# Altium PCB HCPL-3120 DIP Gate Driver Circuit.PcbDoc
Units mil, origin at the board's own origin, x right, y up, seen from the top; angles counter-clockwise.
Board outline 6000 x 4000 mil, 2 copper layers (Top Layer, Bottom Layer); 119 components, 55 nets, 283 pads, 0 vias.
Unrouted connection lines stored in the file: 228.
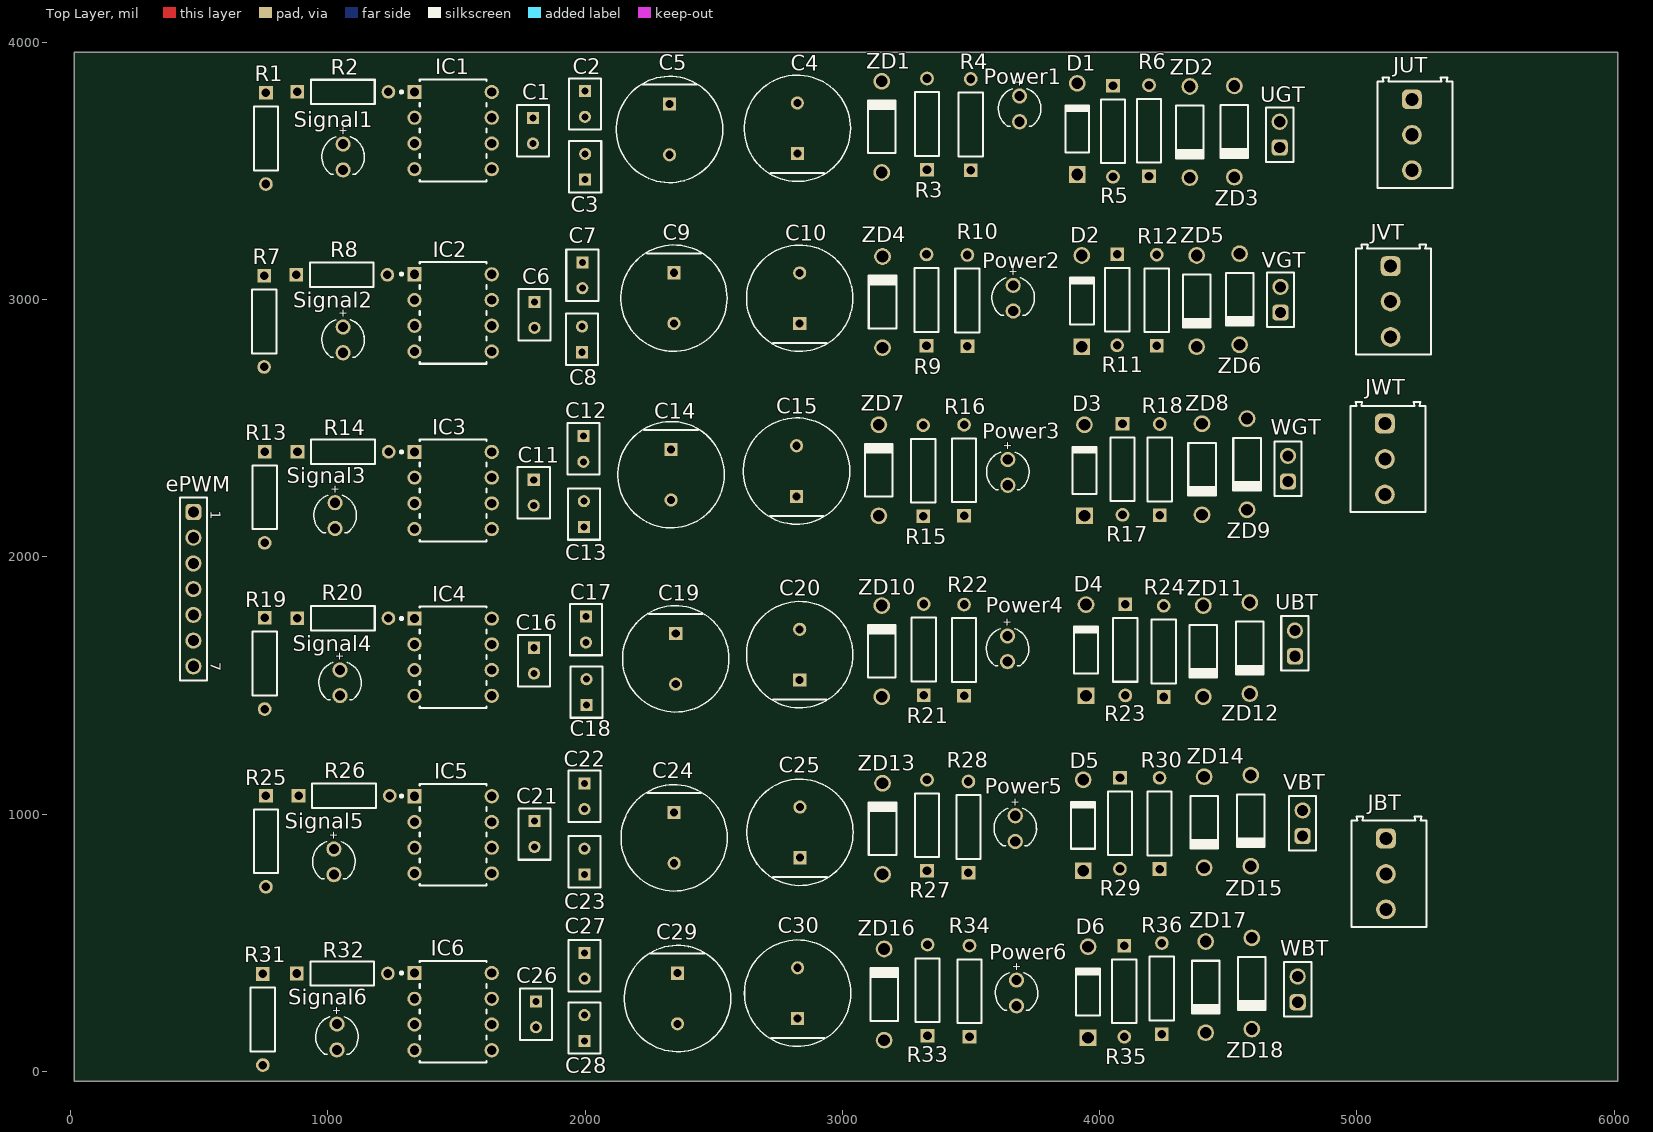
[diagram p0: Top Layer view]
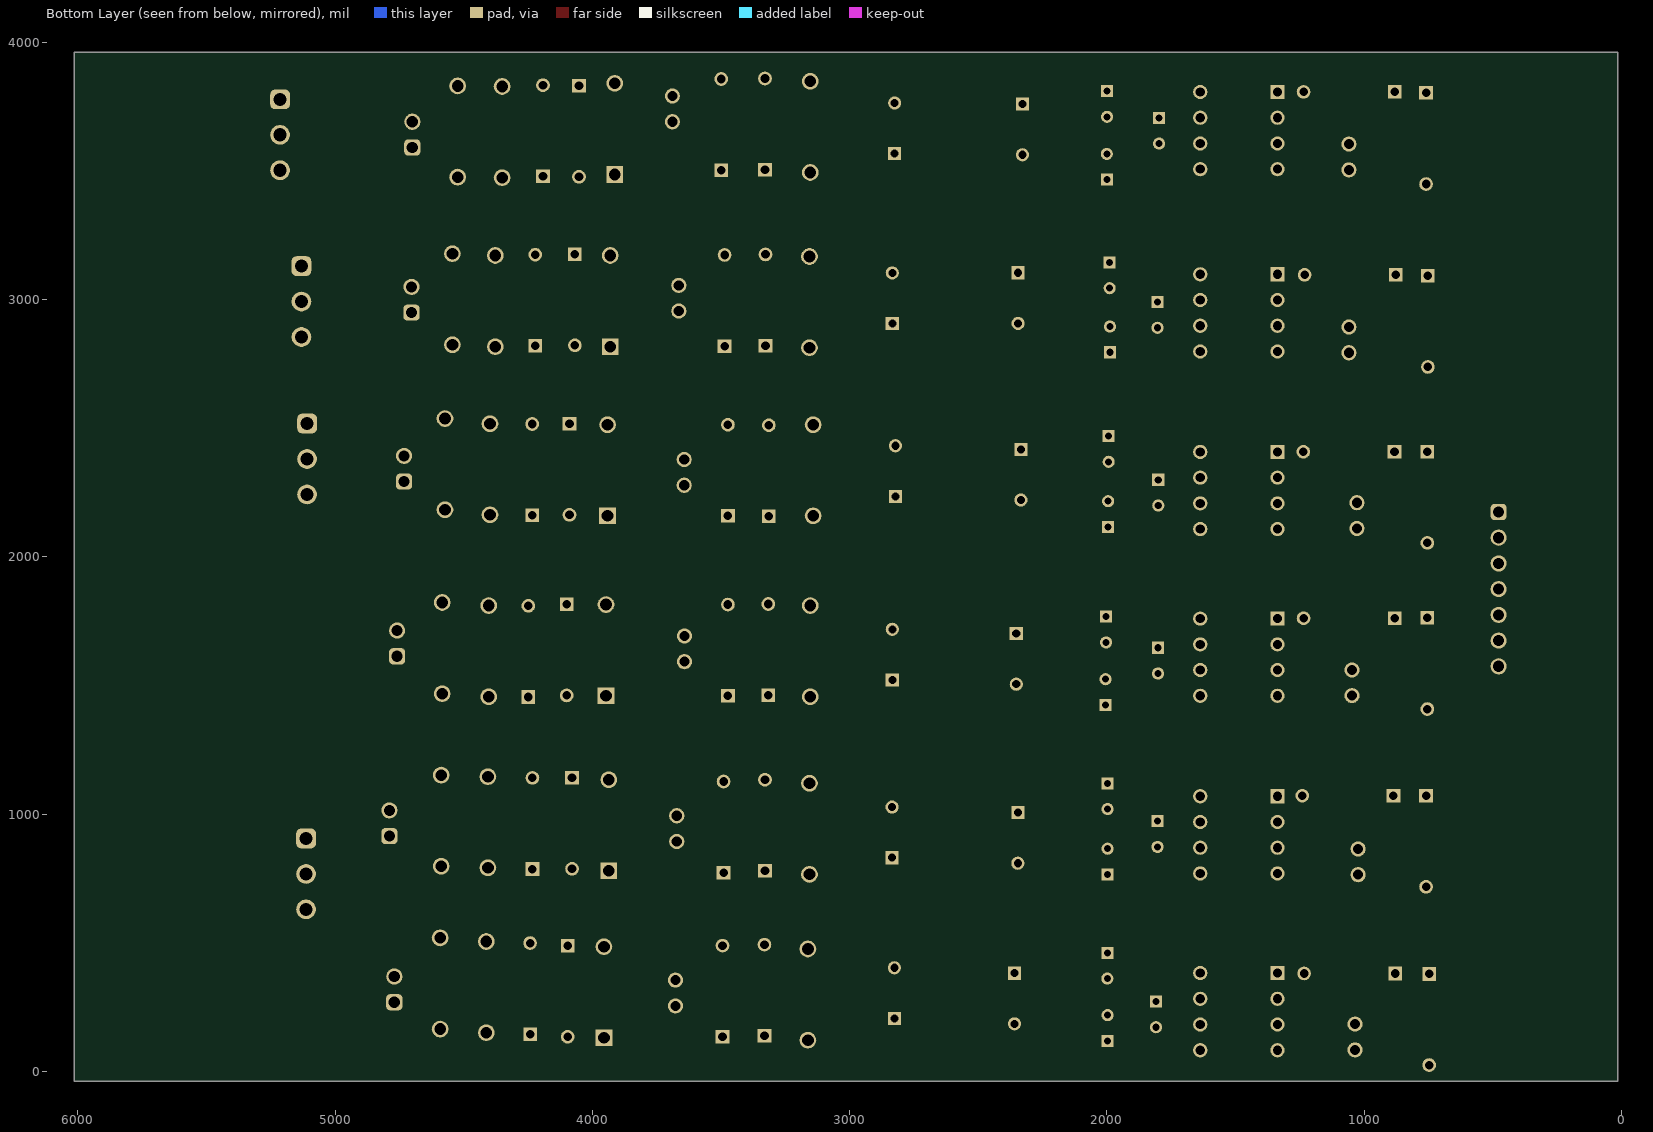
[diagram p1: Bottom Layer view, seen from below]

## Layer stack, top to bottom
Top Solder: solder mask 0.4, Solder Resist, Dk 3.5
Top Layer: signal copper 1.4
Dielectric 1: dielectric 12.6, FR-4, Dk 4.8
Bottom Layer: signal copper 1.4
Bottom Solder: solder mask 0.4, Solder Resist, Dk 3.5

## Board outline
14,-38 6014,-38 6014,3962 14,3962

## Design rules (kind name [scope] priority, off if disabled: settings)
Clearance [All] p1: gap=10 ignorepadtopadclearanceinfootprint=FALSE except(0: Arc-Hole Track-Hole SMDPad-Hole THPad-Hole Via-Hole Fill-Hole Poly-Hole Region-Hole Text-Hole)
PolygonConnect [All] p1: connectstyle=Relief reliefconductorwidth=10 reliefentries=4 polygonreliefangle="90 Angle" airgapwidth=10
RoutingVias [All] p1: holewidth=28 width=50 viastyle="Through Hole" minholewidth=28 minwidth=50 maxholewidth=28 maxwidth=50
SolderMaskExpansion [All] p1: expansion=4 istentingtop=FALSE
Width [All] p1: maxlimit=10 minlimit=10 preferedwidth=10
30 further rules are at their usual default settings.

## Components (designator, comment, footprint, x,y, rotation, side; value= is the part's Value field where it differs from the comment)
C1 "SR205C104KAR" FP-SR20-MFG 1797,3657 r270 top value=100nF
C2 "SR205C104KAR" FP-SR20-MFG 1999,3761 r270 top value=100nF
C3 "SR205C104KAR" FP-SR20-MFG 2000,3517 r90 top value=100nF
C4 "EEUTA1H101" FP-RAD-TH-D_10_0_5-L_12_5-MFG 2825,3666.43 r90 top
C5 "EEUTA1H101" FP-RAD-TH-D_10_0_5-L_12_5-MFG 2328,3662 r270 top
C6 "SR205C104KAR" FP-SR20-MFG 1803,2941 r270 top value=100nF
C7 "SR205C104KAR" FP-SR20-MFG 1989,3095 r270 top value=100nF
C8 "SR205C104KAR" FP-SR20-MFG 1988,2846 r90 top value=100nF
C9 "EEUTA1H101" FP-RAD-TH-D_10_0_5-L_12_5-MFG 2345,3006.42 r270 top
C10 "EEUTA1H101" FP-RAD-TH-D_10_0_5-L_12_5-MFG 2834,3006 r90 top
C11 "SR205C104KAR" FP-SR20-MFG 1800,2250 r270 top value=100nF
C12 "SR205C104KAR" FP-SR20-MFG 1993,2420 r270 top value=100nF
C13 "SR205C104KAR" FP-SR20-MFG 1995,2167 r90 top value=100nF
C14 "EEUTA1H101" FP-RAD-TH-D_10_0_5-L_12_5-MFG 2334,2320 r270 top
C15 "EEUTA1H101" FP-RAD-TH-D_10_0_5-L_12_5-MFG 2822,2334 r90 top
C16 "SR205C104KAR" FP-SR20-MFG 1801,1597 r270 top value=100nF
C17 "SR205C104KAR" FP-SR20-MFG 2003,1718 r270 top value=100nF
C18 "SR205C104KAR" FP-SR20-MFG 2005,1475 r90 top value=100nF
C19 "EEUTA1H101" FP-RAD-TH-D_10_0_5-L_12_5-MFG 2352,1604 r270 top
C20 "EEUTA1H101" FP-RAD-TH-D_10_0_5-L_12_5-MFG 2834,1620.43 r90 top
C21 "SR205C104KAR" FP-SR20-MFG 1803,923 r270 top value=100nF
C22 "SR205C104KAR" FP-SR20-MFG 1997,1070 r270 top value=100nF
C23 "SR205C104KAR" FP-SR20-MFG 1997,816 r90 top value=100nF
C24 "EEUTA1H101" FP-RAD-TH-D_10_0_5-L_12_5-MFG 2346,908 r270 top
C25 "EEUTA1H101" FP-RAD-TH-D_10_0_5-L_12_5-MFG 2835,929.43 r90 top
C26 "SR205C104KAR" FP-SR20-MFG 1809,222 r270 top value=100nF
C27 "SR205C104KAR" FP-SR20-MFG 1998,411 r270 top value=100nF
C28 "SR205C104KAR" FP-SR20-MFG 1997,169 r90 top value=100nF
C29 "EEUTA1H101" FP-RAD-TH-D_10_0_5-L_12_5-MFG 2359,283.57 r270 top
C30 "EEUTA1H101" FP-RAD-TH-D_10_0_5-L_12_5-MFG 2826,304.57 r90 top
D1 "1N4007-B" DIOD-DO-41-P-2_V 3913,3664 r90 top
D2 "1N4007-B" DIOD-DO-41-P-2_V 3931,2995 r90 top
D3 "1N4007-B" DIOD-DO-41-P-2_V 3941,2337 r90 top
D4 "1N4007-B" DIOD-DO-41-P-2_V 3947,1638 r90 top
D5 "1N4007-B" DIOD-DO-41-P-2_V 3936,957 r90 top
D6 "1N4007-B" DIOD-DO-41-P-2_V 3955,308 r90 top
ePWM "61300711121" 61300711121 477,1875 r270 top
IC1 "HCPL-3120" PCBComponent_1 1301.83,3452.67 r0 top
IC2 "HCPL-3120" PCBComponent_1 1301.83,2744.01 r0 top
IC3 "HCPL-3120" PCBComponent_1 1301.83,2053.46 r0 top
IC4 "HCPL-3120" PCBComponent_1 1301.83,1405.43 r0 top
IC5 "HCPL-3120" PCBComponent_1 1301.83,714.87 r0 top
IC6 "HCPL-3120" PCBComponent_1 1301.83,27.47 r0 top
JBT "691214110003" 691214110003 5124.81,768 r270 top
JUT "691214110003" 691214110003 5225.81,3641.2 r270 top
JVT "691214110003" 691214110003 5143,2993 r270 top
JWT "691214110003" 691214110003 5120.81,2381 r270 top
Power1 "151031VS04000" WL-TMRC_D3.95H5.3 53689,-46258 r270 top
Power2 "151031VS04000" WL-TMRC_D3.95H5.3 53664,-46994 r270 top
Power3 "151031VS04000" WL-TMRC_D3.95H5.3 53643,-47671 r270 top
Power4 "151031VS04000" WL-TMRC_D3.95H5.3 53642,-48357 r270 top
Power5 "151031VS04000" WL-TMRC_D3.95H5.3 53672,-49056 r270 top
Power6 "151031VS04000" WL-TMRC_D3.95H5.3 53677,-49695 r270 top
R1 "MFR-25FBF52-1K" RESA60-630X240 759,3627 r270 top
R2 "MFR-25FBF52-221R" RESA60-630X240 1058,3808 r0 top
R3 "MFR-25FBF52-1K" RESA60-630X240 3329,3683 r90 top
R4 "MFR-25FBF52-1K" RESA60-630X240 3499,3681 r90 top
R5 "MFR-25FBF52-47R5" RESA60-630X240 4052,3655 r270 top
R6 "MFR-25FBF5210K" RESA60-630X240 4192,3657 r90 top
R7 "MFR-25FBF52-1K" RESA60-630X240 752,2916 r270 top
R8 "MFR-25FBF52-221R" RESA60-630X240 1054,3097 r0 top
R9 "MFR-25FBF52-1K" RESA60-630X240 3327,2999 r90 top
R10 "MFR-25FBF52-1K" RESA60-630X240 3486,2997 r90 top
R11 "MFR-25FBF52-47R5" RESA60-630X240 4068,3000 r270 top
R12 "MFR-25FBF5210K" RESA60-630X240 4222,2998 r90 top
R13 "MFR-25FBF52-1K" RESA60-630X240 754,2232 r270 top
R14 "MFR-25FBF52-221R" RESA60-630X240 1059,2409 r0 top
R15 "MFR-25FBF52-1K" RESA60-630X240 3314,2335 r90 top
R16 "MFR-25FBF52-1K" RESA60-630X240 3473,2337 r90 top
R17 "MFR-25FBF52-47R5" RESA60-630X240 4089,2341 r270 top
R18 "MFR-25FBF5210K" RESA60-630X240 4234,2339.83 r90 top
R19 "MFR-25FBF52-1K" RESA60-630X240 754,1586 r270 top
R20 "MFR-25FBF52-221R" RESA60-630X240 1058,1762 r0 top
R21 "MFR-25FBF52-1K" RESA60-630X240 3316,1640 r90 top
R22 "MFR-25FBF52-1K" RESA60-630X240 3473,1638 r90 top
R23 "MFR-25FBF52-47R5" RESA60-630X240 4100,1639 r270 top
R24 "MFR-25FBF5210K" RESA60-630X240 4249,1633 r90 top
R25 "MFR-25FBF52-1K" RESA60-630X240 759,895 r270 top
R26 "MFR-25FBF52-221R" RESA60-630X240 1063,1072 r0 top
R27 "MFR-25FBF52-1K" RESA60-630X240 3329,957 r90 top
R28 "MFR-25FBF52-1K" RESA60-630X240 3490,950 r90 top
R29 "MFR-25FBF52-47R5" RESA60-630X240 4079,965 r270 top
R30 "MFR-25FBF5210K" RESA60-630X240 4233,964 r90 top
R31 "MFR-25FBF52-1K" RESA60-630X240 747,202 r270 top
R32 "MFR-25FBF52-221R" RESA60-630X240 1056,381 r0 top
R33 "MFR-25FBF52-1K" RESA60-630X240 3331,316 r90 top
R34 "MFR-25FBF52-1K" RESA60-630X240 3494,312 r90 top
R35 "MFR-25FBF52-47R5" RESA60-630X240 4096,312 r270 top
R36 "MFR-25FBF5210K" RESA60-630X240 4242,322 r90 top
Signal1 "151031SS04000" WL-TMRC_D3.95H5.3 51059,-46445 r270 top
Signal2 "151031SS04000" WL-TMRC_D3.95H5.3 51059,-47156 r270 top
Signal3 "151031SS04000" WL-TMRC_D3.95H5.3 51028,-47839 r270 top
Signal4 "151031SS04000" WL-TMRC_D3.95H5.3 51047,-48489 r270 top
Signal5 "151031SS04000" WL-TMRC_D3.95H5.3 51023,-49185 r270 top
Signal6 "151031SS04000" WL-TMRC_D3.95H5.3 51035,-49866 r270 top
UBT "61300211121" 61300211121 4759,1664 r90 top
UGT "61300211121" 61300211121 4700,3642 r90 top
VBT "61300211121" 61300211121 4789,965 r90 top
VGT "61300211121" 61300211121 4703,3000 r90 top
WBT "61300211121" 61300211121 4770,319 r90 top
WGT "61300211121" 61300211121 4732,2343 r90 top
ZD1 "1N4749A" FAIR-DO-41-2_V 3153,3672 r90 top
ZD2 "1N4749A" FAIR-DO-41-2_V 4351,3652 r270 top
ZD3 "1N4749A" FAIR-DO-41-2_V 4524,3654 r270 top
ZD4 "1N4749A" FAIR-DO-41-2_V 3156,2991 r90 top
ZD5 "1N4749A" FAIR-DO-41-2_V 4377,2995 r270 top
ZD6 "6" FAIR-DO-41-2_V 4544,3002 r270 top
ZD7 "1N4749A" FAIR-DO-41-2_V 3142,2337 r90 top
ZD8 "1N4749A" FAIR-DO-41-2_V 4398,2341 r270 top
ZD9 "1N4749A" FAIR-DO-41-2_V 4573,2361 r270 top
ZD10 "1N4749A" FAIR-DO-41-2_V 3153,1634 r90 top
ZD11 "1N4749A" FAIR-DO-41-2_V 4403,1634 r270 top
ZD12 "1N4749A" FAIR-DO-41-2_V 4584,1646 r270 top
ZD13 "1N4749A" FAIR-DO-41-2_V 3156,943.17 r90 top
ZD14 "1N4749A" FAIR-DO-41-2_V 4406,968.83 r270 top
ZD15 "1N4749A" FAIR-DO-41-2_V 4588,975 r270 top
ZD16 "1N4749A" FAIR-DO-41-2_V 3162,299 r90 top
ZD17 "1N4749A" FAIR-DO-41-2_V 4412,328 r270 top
ZD18 "1N4749A" FAIR-DO-41-2_V 4592,342 r270 top

## Footprints (in the part's own frame and the unit in brackets; to place one, negate y for a bottom-side part, rotate by r counter-clockwise, add the part's x,y. Pads: shape width x height; smd on the part's side, far side on the other; paste and mask are expansions set on the pad)
61300211121 [mm] "Pin Header, pitch 2.54 mm, THT, Vertical, single row, 2p"
  rrect50% 1.6x1.6 hole 1.1: 1(-1.27,0)
  round 1.6 hole 1.1: 2(1.27,0)
  silkscreen extent -2.69,-1.34 2.69,1.34, body extent -2.54,-1.27 2.54,1.27, height 8.57
61300711121 [mm] "Pin Header, pitch 2.54 mm, THT, Vertical, single row, 7p"
  rrect50% 1.6x1.6 hole 1.1: 1(-7.62,0)
  round 1.6 hole 1.1: 2(-5.08,0) 3(-2.54,0) 4(0,0) 5(2.54,0) 6(5.08,0) 7(7.62,0)
  silkscreen extent -9.04,-1.34 9.04,1.34, body extent -8.89,-1.27 8.89,1.27, height 8.57
691214110003 [mm] "3.50 mm Horizontal Entry Modular, 3p"
  rrect50% 1.95x1.95 hole 1.3: 1(-3.5,-0.3)
  round 1.95 hole 1.3: 2(0,-0.3) 3(3.5,-0.3)
  silkscreen extent -5.65,-3.7 5.25,3.7, body extent -5.7,-3.7 5.25,3.7, height 8.55
DIOD-DO-41-P-2_V [mm] "2-Leads, Axial Lead, Body 4.635x2.36mm, Pin Spacing 9mm"
  rect 1.65x1.65 hole 1.15: 1(-4.5,0)
  round 1.65 hole 1.15: 2(4.5,0)
  silkscreen extent -2.32,-1.18 2.32,1.18, body extent -4.93,-1.18 4.93,1.18, height 2.35
FAIR-DO-41-2_V [mm] "2-Leads, Axial leaded, Body 2.72x5.2mm, Pin Spacing 9mm"
  round 1.65 hole 1.15: 1(-4.5,0) 2(4.5,0)
  silkscreen extent -2.6,-1.36 2.6,1.36, body extent -4.93,-1.36 4.93,1.36, height 2.71
FP-RAD-TH-D_10_0_5-L_12_5-MFG [mm]
  rect 1.3x1.3 hole 0.8 paste-1000 mask+0: 1(-2.5,0)
  round 1.3 hole 0.8 paste-1000 mask+0: 2(2.5,0)
  silkscreen extent -5.25,-5.25 5.25,5.25, body extent -5.35,-5.35 5.35,5.35, height 0.25
FP-SR20-MFG [mm]
  rect 1.2x1.2 hole 0.7 paste-1000 mask+0: 1(-1.27,0)
  round 1.2 hole 0.7 paste-1000 mask+0: 2(1.27,0)
  silkscreen extent -2.54,-1.59 2.54,1.59, body extent -2.64,-1.69 2.64,1.69, height 0.25
PCBComponent_1 [mm]
  rect 1.4x1.4 hole 0.9 paste-1000 mask+0: 1(0.889,9.017)
  round 1.4 hole 0.9 paste-1000 mask+0: 2(0.889,6.477) 3(0.889,3.937) 4(0.889,1.397) 5(8.509,1.397) 6(8.509,3.937) 7(8.509,6.477) 8(8.509,9.017)
  silkscreen extent -0.53,0.18 8,10.23, body extent 0.09,0.08 9.31,10.33, height 0.25
RESA60-630X240 [mm] "Axial Resistor, 2-Leads, Dia 2.4mm, Body Length 6.3mm"
  rect 1.35x1.35 hole 0.85: 1(-4.5,0)
  round 1.35 hole 0.85: 2(4.5,0)
  silkscreen extent -3.15,-1.2 3.15,1.2, body extent -3.15,-1.2 3.15,1.2, height 2.4
WL-TMRC_D3.95H5.3 [mm] "THT Mono-color Round Color LED, 2-leads"
  round 1.5 hole 1: 1(-1271.27,-1270) 2(-1268.73,-1270)
  silkscreen extent -1272,-1272.1 -1268.31,-1267.9, body extent -1271.99,-1271.97 -1268.37,-1268.03, height 5.35

## Part data
C1 C2 C3 C6 C7 C8 C11 C12 C13 C16 C17 C18 C21 C22 C23 C26 C27 C28: library part CMP-04427-000013-1, "CAP CER 0.1UF 50V X7R RADIAL", Capacitance=100nF, Manufacturer=AVX, Package=SR20, Temperature="-55°C to +125°C", Temperature Characteristic=X7R, Temperature Range High=+125°C, Temperature Range Low=-55°C, Tolerance=10%, Voltage=50V, Automotive=No, Category=Cap, ComponentLink2Description=Datasheet, ComponentLink2URL=http://datasheets.avx.com/SR-Series.pdf, Device Class L1="Passive Components", Device Class L2=Capacitors, Device Class L3="Ceramic Capacitors", Digikey Description="CAP CER 0.1UF 50V X7R RADIAL", Height=5.08mm, Lead Free=Yes, Manufacturer Part Number=SR205C104KAR, Material=Ceramic, Mouser Description="Multilayer Ceramic Capacitors MLCC - Leaded 50volts 0.1uF 10% X7R", Octopart=https://octopart.com/sr205c104kar-avx-145048, RoHS=TRUE, Voltage Rating=50V
C4 C5 C9 C10 C14 C15 C19 C20 C24 C25 C29 C30: library part CMP-05427-000114-1, "Aluminum Electrolytic Capacitors (Radial Lead Type) AEC-Q200 Qualified 100uF ±20% 50V", Capacitance=100uF, Case/Package=Radial, ESR (Equivalent Series Resistance)=180mR, Max Operating Temperature=125°C, Min Operating Temperature=-40°C, Package Quantity=200, Ripple Current=555mA, Tolerance=20%, Voltage Rating=50V, Contact Plating=Tin, Diameter=10mm, Height=12.5mm, Height - Seated (Max)=0.531inch, Impedance=180mR, Lead Diameter=0.6mm, Lead Pitch=5mm, Length=12.5mm, Life (Hours)=2000Hour, Mount="Through Hole", Packaging=Bulk, Radiation Hardening=No, REACH SVHC="No SVHC", RoHS Compliant=Yes, Series=TA, Termination=Radial, Voltage Rating (DC)=50V
D1 D2 D3 D4 D5 D6: library part CMP-0639-00010-2, "30V, 1A Rectifier, 8 pF, -65 to 150 degC, 2-Pin DO-41 Plastic, RoHS, Bulk", Manufacturer="Diodes Inc", Max. Average Rectified Current IO (A)=1, Operating Temperature Range (degC)="-65 to 150", ComponentLink1Description="Manufacturer URL", ComponentLink1URL=http://diodes.com/, ComponentLink2Description=Datasheet, ComponentLink2URL=http://diodes.com/datasheets/ds28002.pdf, CT (pF)=8, DatasheetVersion="Rev. 8-2", Max. IFSM (A)=30, Max. IR (uA)=5, Mounting Technology="Through Hole", PackageDescription="2-Pin Axial Lead, Body 4.635 x 2.36 mm, Lead Spread 25.4 mm", PackageReference=DO-41-P-2, Packing=Bulk, PartNumber=1N4007-B, RoHS=TRUE, VF (V)=1, VRRM (V)=1000
ePWM: library part CMP-1502-01074-2, Color=Black, Contact Resistance=20mΩ, Current Rating=3A, Operating Supply Voltage=250V, Connector Type="Male Pin", Contact Material=Copper, Contact Mating Length=5.9944mm, Contact Plating=Gold, Gender=Male, Lead Pitch=2.54mm, Mount="Through Hole", NexarPartId=32855531, Number of Contacts=7, Number of Pins=7, Number of Positions=7, Number of Rows=1, Orientation=Vertical, Packaging=Bulk, Pitch=2.54mm, REACH SVHC=Unknown, RoHS=Compliant, Termination=Solder
IC1 IC2 IC3 IC4 IC5 IC6: library part CMP-18400-000012-1, "OPTOISO 3.75KV 1CH GATE DVR 8DIP"
JBT JUT JVT JWT: library part CMP-1502-02466-2, Color="Blue, Green", Current=10A, Max Operating Temperature=105°C, Min Operating Temperature=-40°C, Voltage=300V, Contact Material=Brass, Contact Plating="Brass, Tin", Current Rating=10A, Height=12.2mm, Housing Material=Nylon, Lead Pitch=3.5mm, Length=7.4mm, Mount="Through Hole", NexarPartId=18818289, Number of Contacts=3, Number of Levels=1, Number of Pins=3, Number of Positions Per Level=3, Packaging=Box, Pitch=3.5052mm, Plating="Brass, Steel", REACH SVHC=Unknown, RoHS=Compliant, Stripping Length=-6mm, Termination=Screw, Voltage Rating=300V, Width=10.9mm, Wire Gauge (Max)=24AWG, Wire Gauge (Min)=16AWG, Wire/Cable Gauge=24AWG
Power1 Power2 Power3 Power4 Power5 Power6: library part CMP-1488-00001-2, "Led, Green, T-1 (3Mm), 570 Nm, 2.1 V, 30 Ma, 120 Mcd", Case/Package=Radial, Color=Green, Forward Current=100mA, Forward Voltage=2.1V, Max Operating Temperature=85°C, Max Reverse Voltage (DC)=5V, Min Operating Temperature=-40°C, Test Current=20mA, Dominant Wavelength=570nm, Height=5.3mm, Length=3mm, Lens Size=3mm, Lens Style="Circular, Diffused, Round", Luminous Intensity=120mcd, Mount="Through Hole", NexarPartId=29717804, Number of Pins=2, Packaging=Bulk, Peak Wavelength=573nm, REACH SVHC=Unknown, RoHS=Compliant, Viewing Angle=40°, Wavelength=570nm, Width=3mm
R1 R3 R4 R7 R9 R10 R13 R15 R16 R19 R21 R22 R25 R27 R28 R31 R33 R34: library part CMP-1659-00075-1, "Axial Resistor, 1K Ohm, +/- 1%, 0.25W, -55 to 155 degC, 2-Pin THD, RoHS, Bulk", Case\Package=Axial, Max Operating Temperature="155 degC", Min Operating Temperature="-55 degC", Package Quantity=200, Power Rating="250 mW", Resistance="10 kohm", Tolerance=1%, Voltage Rating="250 V", ComponentLink1Description="Manufacturer URL", ComponentLink1URL=http://www.yageo.com/, ComponentLink2Description=Datasheet, ComponentLink2URL=http://www.yageo.com/documents/recent/Yageo%20LR_MFR_2013.pdf, DatasheetVersion=Apr-13, Length="0.248 inch", PackageDescription="2-Pin Axial Lead, Dia 2.4 mm, Body Length 6.3 mm", PackageReference=MFR-25, Packaging=Bulk, RoHSCompliant=true
R2 R8 R14 R20 R26 R32: library part CMP-1659-00072-1, "Axial Resistor, 330 Ohm, +/- 1%, 0.25W, -55 to 155 degC, 2-Pin THD, RoHS, Bulk", Case\Package=QFN, Max Operating Temperature="85 degC", Max Supply Voltage="3.6 V", Min Operating Temperature="-40 degC", Min Supply Voltage="1.95 V", Nominal Supply Voltage="2.5 V", Package Quantity=1000, Bandwidth="800 Hz", ComponentLink1Description="Manufacturer URL", ComponentLink1URL=http://www.yageo.com/, ComponentLink2Description=Datasheet, ComponentLink2URL=http://www.yageo.com/documents/recent/Yageo%20LR_MFR_2013.pdf, DatasheetVersion=Apr-13, Height="0.95 mm", Interface=I2C, Length="3 mm", Mount="Surface Mount", PackageDescription="2-Pin Axial Lead, Dia 2.4 mm, Body Length 6.3 mm", PackageReference=MFR-25, Packaging="Tape and Reel", Pins=16, Radiation Hardening=No, REACH SVHC="No SVHC", RoHSCompliant=true, Weight="0.001122 oz"
R5 R11 R17 R23 R29 R35: library part CMP-1659-00067-1, "Axial Resistor, 30 Ohm, +/- 1%, 0.25 W, -55 to 155 degC, 2-Pin THD, RoHS, Bulk", Case\Package=SOIC, Max Operating Temperature="85 degC", Max Supply Voltage="5 V", Min Operating Temperature="-40 degC", Min Supply Voltage="3 V", Nominal Supply Current="170 uA", Nominal Voltage Gain="100 dB", Output Current="160 mA", Package Quantity=2500, Bandwidth="1 MHz", Channels=4, Common Mode Rejection Ratio="50 dB", ComponentLink1Description="Manufacturer URL", ComponentLink1URL=http://www.yageo.com/, ComponentLink2Description=Datasheet, ComponentLink2URL=http://www.yageo.com/documents/recent/Yageo%20LR_MFR_2013.pdf, DatasheetVersion=Apr-13, Height="1.58 mm", Length="8.65 mm", Mount="Surface Mount", Nominal Gain Bandwith Product="1 MHz", PackageDescription="2-Pin Axial Lead, Dia 2.4 mm, Body Length 6.3 mm", PackageReference=MFR-25, Packaging="Tape and Reel", Pins=14, Radiation Hardening=No, REACH SVHC="No SVHC", RoHSCompliant=true, Slew Rate="1 V\us", Unity Gain Bandwidth Product="1 MHz", Width="3.91 mm"
R6 R12 R18 R24 R30 R36: library part CMP-1659-00074-2, "Axial Resistor, 10K Ohm, +/- 1%, 0.25 W, -55 to 155 degC, 2-Pin THD, RoHS, Bulk", Case\/Package=Axial, Manufacturer=Yageo, Max Operating Temperature=155degC, Max Power Dissipation=250mW, Min Operating Temperature=-55degC, Package Description="2-Pin Axial Lead, Dia 2.4 mm, Body Length 6.3 mm", Package Quantity=200, Package Reference=MFR-25, Resistance=10KOhm, Temperature Coefficient=100ppm\/degreesC, Tolerance=1%, Voltage Rating=250V, Voltage Rating (DC)=200V, Composition=MetalFilm, Datasheet URL=http://www.yageo.com/documents/recent/Yageo%20LR_MFR_2013.pdf, Datasheet Version=04/2013, Lead Free=LeadFree, Length=0.248inch, Manufacturer URL=http://www.yageo.com/, Military Standard=Not, Mount=ThroughHole, Mounting Technology=ThroughHole, Number of Terminations=2, Packaging=Bulk, Power Rating=250mW, RoHSCompliant=True, Termination=Axial
Signal1 Signal2 Signal3 Signal4 Signal5 Signal6: library part CMP-1488-00005-2, "Led, Red, T-1 (3Mm), 635 Nm, 2 V, 30 Ma, 160 Mcd", Case/Package=Radial, Color=Red, Forward Current=100mA, Forward Voltage=2V, Max Operating Temperature=85°C, Max Reverse Voltage (DC)=5V, Min Operating Temperature=-40°C, Test Current=20mA, Dominant Wavelength=635nm, Height=5.3mm, Length=3mm, Lens Size=3mm, Lens Style="Circular, Diffused, Round", Luminous Intensity=160mcd, Mount="Through Hole", NexarPartId=29717802, Packaging=Bulk, Peak Wavelength=640nm, REACH SVHC=Unknown, RoHS=Compliant, Viewing Angle=40°, Wavelength=635nm, Width=3mm
UBT UGT VBT VGT WBT WGT: library part CMP-1712-00002-5, Color=Black, Contact Resistance=20mΩ, Current Rating=3A, Max Operating Temperature=125°C, Min Operating Temperature=-40°C, Operating Supply Voltage=250V, Connector Type="Male Pin", Contact Gender=Male, Contact Material=Copper, Contact Mating Length=5.9944mm, Contact Plating=Gold, Gender=Male, Height=8.94mm, Housing Material=PBT, Lead Free="Lead Free", Lead Pitch=2.54mm, Mount="Through Hole", NexarPartId=20081794, Number of Contacts=2, Number of Pins=2, Number of Positions=2, Number of Rows=1, Orientation=Vertical, Packaging=Bulk, Pitch=2.54mm, REACH SVHC="No SVHC", RoHS=Compliant, Termination="Through Hole", Voltage Rating=250V
ZD1 ZD4 ZD7 ZD10 ZD13 ZD16: library part CMP-0892-00026-1, "Zener Diode, 4.7V, 500mW, 5%, -65 to 200 degC, 2-Pin DO-41, Body 2.72 x 5.2 mm, RoHS", Manufacturer="Fairchild Semiconductor", Operating and Storage Temperature Range="-65 to 200 degC", Test Current IZ (mA)=10.5, Tolerance=5%, ComponentLink1Description="Manufacturer URL", ComponentLink1URL=http://www.fairchildsemi.com/, ComponentLink2Description=Datasheet, ComponentLink2URL=http://www.fairchildsemi.com/ds/1N/1N4744A.pdf, ComponentLink3Description="Package Specification", ComponentLink3URL=http://www.fairchildsemi.com/dwg/DO/DO41A.pdf, DatasheetVersion="Rev. H3", IR (uA)=5, Mounting Technology="Through Hole", PackageDescription="2-Pin Axial leaded, Body 2.72 x 5.2 mm, Lead Spread 25.4 mm", PackageReference=DO-41-2, PackageVersion="Rev. 2", PartNumber=1N4749A, PD (W)=1, RoHS=TRUE, VZ (Max.) (V)=25.2, VZ (Min.) (V)=22.8, ZZ (Max) (ohm)=25
ZD2 ZD3 ZD5 ZD8 ZD9 ZD11 ZD12 ZD14 ZD15 ZD17 ZD18: library part CMP-0892-00026-1, "Zener Diode, 15V, 500mW, 5%, -65 to 200 degC, 2-Pin DO-41, Body 2.72 x 5.2 mm, RoHS", Manufacturer="Fairchild Semiconductor", Operating and Storage Temperature Range="-65 to 200 degC", Test Current IZ (mA)=10.5, Tolerance=5%, ComponentLink1Description="Manufacturer URL", ComponentLink1URL=http://www.fairchildsemi.com/, ComponentLink2Description=Datasheet, ComponentLink2URL=http://www.fairchildsemi.com/ds/1N/1N4744A.pdf, ComponentLink3Description="Package Specification", ComponentLink3URL=http://www.fairchildsemi.com/dwg/DO/DO41A.pdf, DatasheetVersion="Rev. H3", IR (uA)=5, Mounting Technology="Through Hole", PackageDescription="2-Pin Axial leaded, Body 2.72 x 5.2 mm, Lead Spread 25.4 mm", PackageReference=DO-41-2, PackageVersion="Rev. 2", PartNumber=1N4749A, PD (W)=1, RoHS=TRUE, VZ (Max.) (V)=25.2, VZ (Min.) (V)=22.8, ZZ (Max) (ohm)=25
ZD6: library part CMP-0892-00026-1, "Zener Diode, 15V, 500mW, 5%, -65 to 200 degC, 2-Pin DO-41, Body 2.72 x 5.2 mm, RoHS", Manufacturer="Fairchild Semiconductor", Operating and Storage Temperature Range="-65 to 200 degC", PartNumber=1N4749A, Test Current IZ (mA)=10.5, Tolerance=5%, ComponentLink1Description="Manufacturer URL", ComponentLink1URL=http://www.fairchildsemi.com/, ComponentLink2Description=Datasheet, ComponentLink2URL=http://www.fairchildsemi.com/ds/1N/1N4744A.pdf, ComponentLink3Description="Package Specification", ComponentLink3URL=http://www.fairchildsemi.com/dwg/DO/DO41A.pdf, DatasheetVersion="Rev. H3", IR (uA)=5, Mounting Technology="Through Hole", PackageDescription="2-Pin Axial leaded, Body 2.72 x 5.2 mm, Lead Spread 25.4 mm", PackageReference=DO-41-2, PackageVersion="Rev. 2", PD (W)=1, RoHS=TRUE, VZ (Max.) (V)=25.2, VZ (Min.) (V)=22.8, ZZ (Max) (ohm)=25

## Nets (pads, with @x,y where several pads share a name; then routed paths per layer and width w, separated by ;. In a path a pad name is that pad's centre, name@x,y a point inside that pad or via, vN(x,y) a via of type N, cw(c..) or ccw(c..) an arc to the next point about the centre after c; other vN are vias at no path point)
D_C: C17.2 C18.2 C19.1 C20.2 C22.2 C23.2 C24.1 C25.2 C27.2 C28.2 C29.1 C30.2 JBT.2 Power4.2 Power5.2 Power6.2 R21.2 R24.2 R27.2 R30.2 R33.2 R36.2 UBT.2 VBT.2 WBT.2 ZD10.2 ZD12.1 ZD13.2 ZD15.1 ZD16.2 ZD18.1
DSP_GND: ePWM.7 IC1.1 IC1.3 IC1.4 IC2.1 IC2.3 IC2.4 IC3.1 IC3.3 IC3.4 IC4.1 IC4.3 IC4.4 IC5.1 IC5.3 IC5.4 IC6.1 IC6.3 IC6.4 Signal1.2 Signal2.2 Signal3.2 Signal4.2 Signal5.2 Signal6.2
NetD1_1: D1.1 R5.2 R6.1 UGT.1 ZD2.1
NetD1_2: D1.2 IC1.6 IC1.7 R5.1
NetD2_1: D2.1 R11.2 R12.1 VGT.1 ZD5.1
NetD2_2: D2.2 IC2.6 IC2.7 R11.1
NetD3_1: D3.1 R17.2 R18.1 WGT.1 ZD8.1
NetD3_2: D3.2 IC3.6 IC3.7 R17.1
NetD4_1: D4.1 R23.2 R24.1 UBT.1 ZD11.1
NetD4_2: D4.2 IC4.6 IC4.7 R23.1
NetD5_1: D5.1 R29.2 R30.1 VBT.1 ZD14.1
NetD5_2: D5.2 IC5.6 IC5.7 R29.1
NetD6_1: D6.1 R35.2 R36.1 WBT.1 ZD17.1
NetD6_2: D6.2 IC6.6 IC6.7 R35.1
NetePWM_1: ePWM.1 R1.1 R2.1
NetePWM_2: ePWM.2 R7.1 R8.1
NetePWM_3: ePWM.3 R13.1 R14.1
NetePWM_4: ePWM.4 R19.1 R20.1
NetePWM_5: ePWM.5 R25.1 R26.1
NetePWM_6: ePWM.6 R31.1 R32.1
NetIC1_2: IC1.2 R2.2
NetIC2_2: IC2.2 R8.2
NetIC3_2: IC3.2 R14.2
NetIC4_2: IC4.2 R20.2
NetIC5_2: IC5.2 R26.2
NetIC6_2: IC6.2 R32.2
NetPower1_1: Power1.1 R4.2
NetPower2_1: Power2.1 R10.2
NetPower3_1: Power3.1 R16.2
NetPower4_1: Power4.1 R22.2
NetPower5_1: Power5.1 R28.2
NetPower6_1: Power6.1 R34.2
NetR1_2: R1.2 Signal1.1
NetR7_2: R7.2 Signal2.1
NetR13_2: R13.2 Signal3.1
NetR19_2: R19.2 Signal4.1
NetR25_2: R25.2 Signal5.1
NetR31_2: R31.2 Signal6.1
NetZD2_2: ZD2.2 ZD3.2
NetZD5_2: ZD5.2 ZD6.2
NetZD8_2: ZD8.2 ZD9.2
NetZD11_2: ZD11.2 ZD12.2
NetZD14_2: ZD14.2 ZD15.2
NetZD17_2: ZD17.2 ZD18.2
U_G: C2.2 C3.2 C4.1 C5.2 JUT.2 Power1.2 R3.2 R6.2 UGT.2 ZD1.2 ZD3.1
V_G: C7.2 C8.2 C9.1 C10.2 JVT.2 Power2.2 R9.2 R12.2 VGT.2 ZD4.2 ZD6.1
VCC_B: C16.1 C17.1 C19.2 C21.1 C22.1 C24.2 C26.1 C27.1 C29.2 IC4.8 IC5.8 IC6.8 JBT.1 R21.1 R22.1 R27.1 R28.1 R33.1 R34.1
VCC_U_T: C1.1 C2.1 C4.2 IC1.8 JUT.1 R3.1 R4.1
VCC_V_T: C6.1 C7.1 C9.2 IC2.8 JVT.1 R9.1 R10.1
VCC_W_T: C11.1 C12.1 C14.2 IC3.8 JWT.1 R15.1 R16.1
VEE_B: C16.2 C18.1 C20.1 C21.2 C23.1 C25.1 C26.2 C28.1 C30.1 IC4.5 IC5.5 IC6.5 JBT.3 ZD10.1 ZD13.1 ZD16.1
VEE_U_T: C1.2 C3.1 C5.1 IC1.5 JUT.3 ZD1.1
VEE_V_T: C6.2 C8.1 C10.1 IC2.5 JVT.3 ZD4.1
VEE_W_T: C11.2 C13.1 C15.1 IC3.5 JWT.3 ZD7.1
W_G: C12.2 C13.2 C14.1 C15.2 JWT.2 Power3.2 R15.2 R18.2 WGT.2 ZD7.2 ZD9.1

## Text inside footprints (layer, text, board x,y; h text height)
ePWM: Top Overlay "7" at 543.93,1589.96 h40 r270; Top Overlay "1" at 543.93,2179.72 h40 r270
Power1: Top Overlay "+" at 3675.22,3862.08 h31.5 r270
Power2: Top Overlay "+" at 3650.22,3126.08 h31.5 r270
Power3: Top Overlay "+" at 3629.22,2449.08 h31.5 r270
Power4: Top Overlay "+" at 3628.22,1763.08 h31.5 r270
Power5: Top Overlay "+" at 3658.22,1064.08 h31.5 r270
Power6: Top Overlay "+" at 3663.22,425.08 h31.5 r270
Signal1: Top Overlay "+" at 1045.22,3675.08 h31.5 r270
Signal2: Top Overlay "+" at 1045.22,2964.08 h31.5 r270
Signal3: Top Overlay "+" at 1014.22,2281.08 h31.5 r270
Signal4: Top Overlay "+" at 1033.22,1631.08 h31.5 r270
Signal5: Top Overlay "+" at 1009.22,935.08 h31.5 r270
Signal6: Top Overlay "+" at 1021.22,254.08 h31.5 r270